# EAGLE board Remote Control (EAGLE 6.5.0)
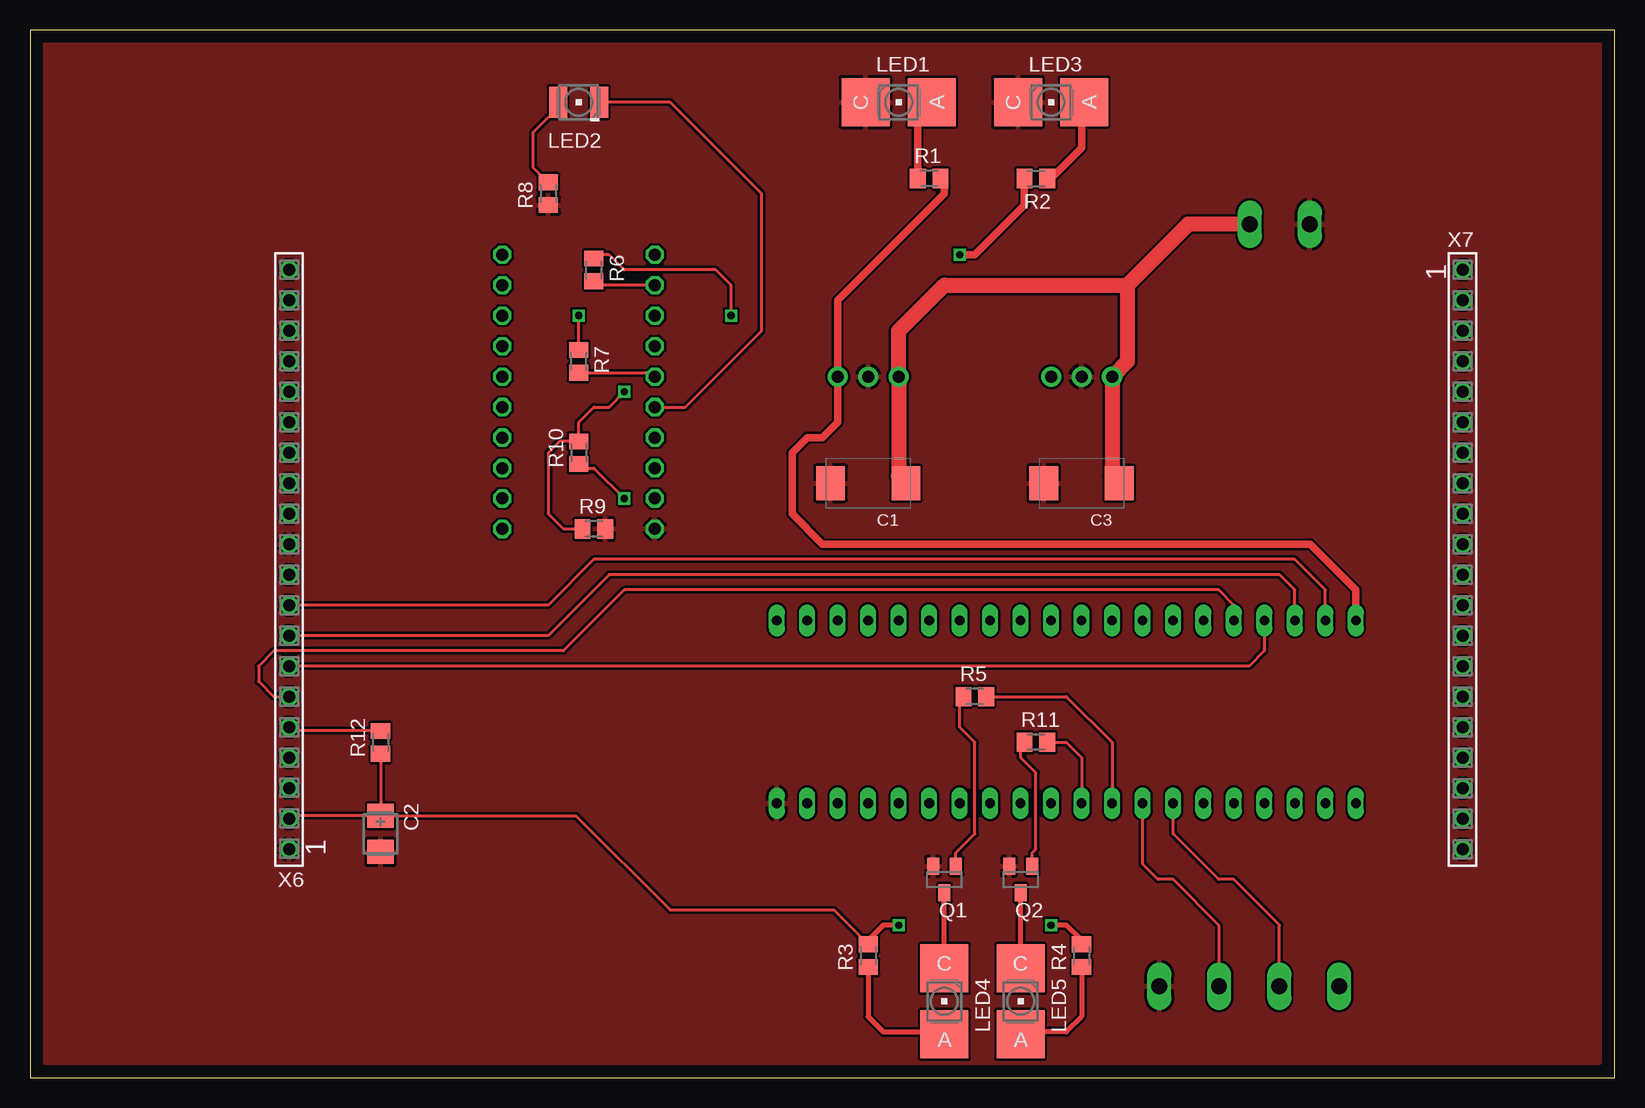
[diagram p0: board, top side]
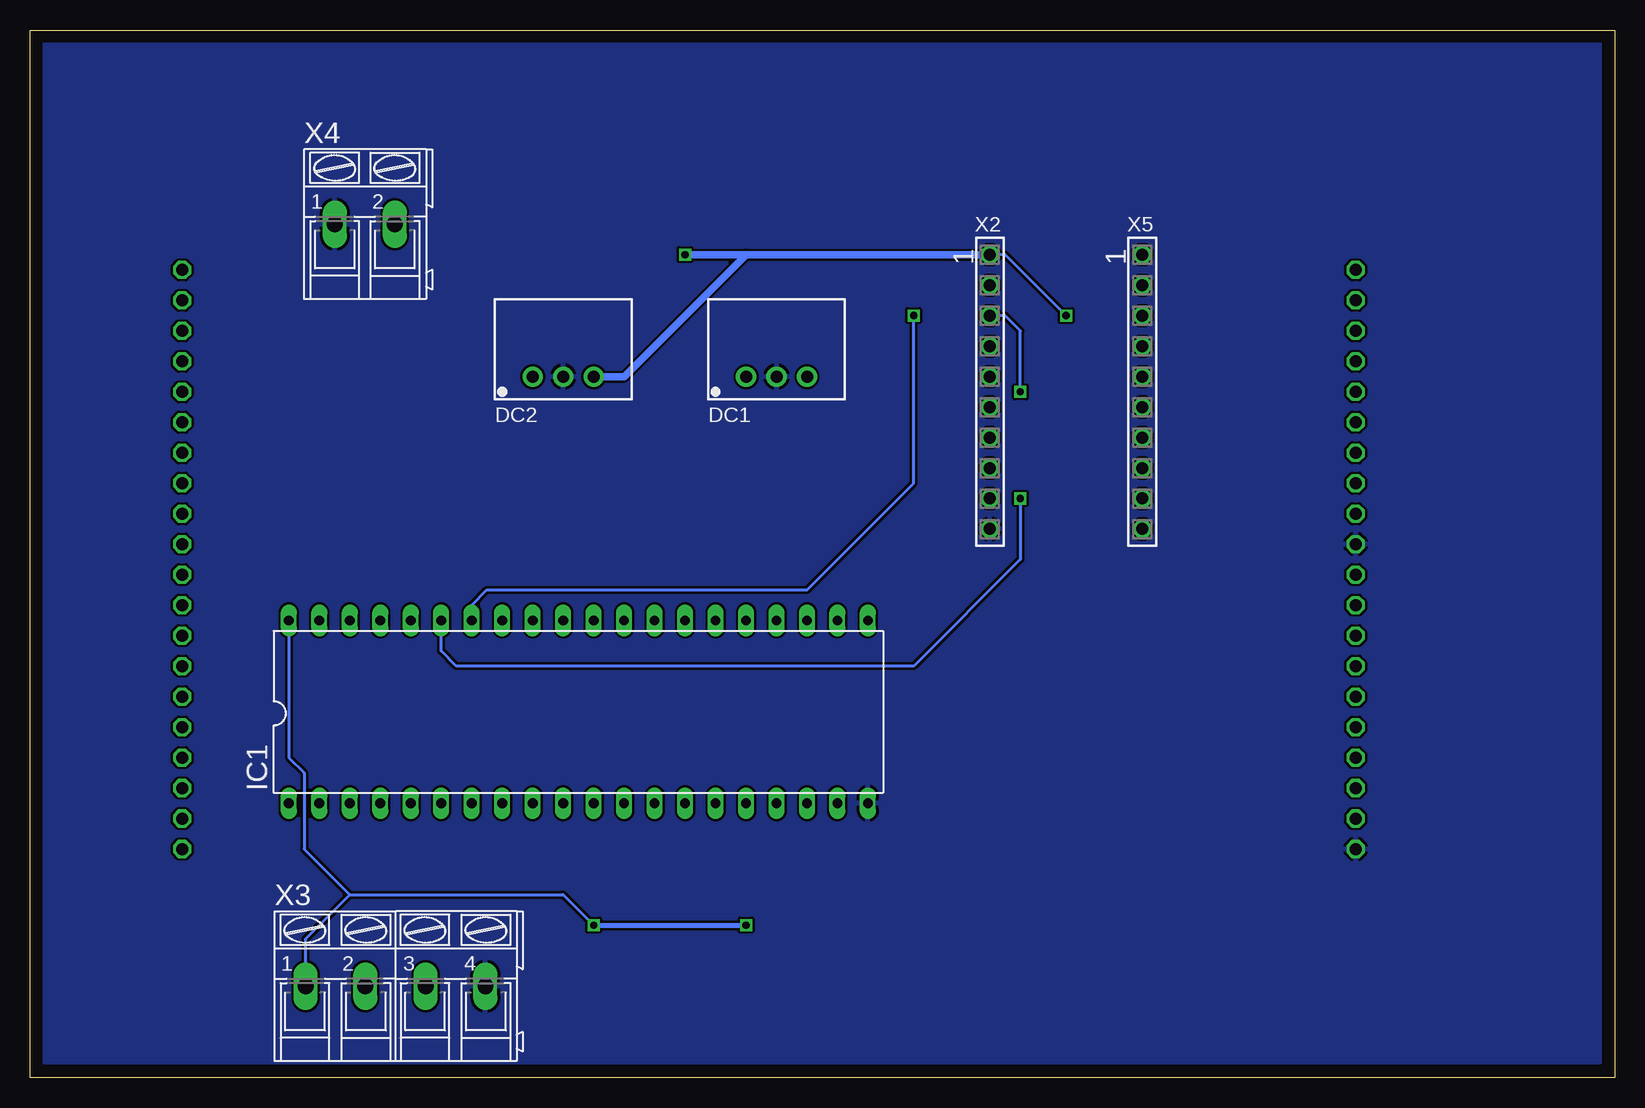
[diagram p1: board, bottom side, seen from below]

Size 132.06 x 87.3 mm. Coordinates in mm from the lower left corner, seen from the top.
Outline: 0,0 132.06,0 132.06,87.3 0,87.3 0,0
Copper layers (1*16): Top 0.035mm / dielectric 1.5mm / Bottom 0.035mm
Design rules "default": minimum track width 10mil, minimum drill 24mil, track to track 8mil, track to pad 8mil, pad to pad 8mil, via to via 8mil, smd to smd 8mil, copper to edge 40mil, drill to drill 8mil, minimum pad ring 10mil, minimum via ring 8mil, stop-mask expansion 4mil, vias tented up to drill 0mil, thermal gap 10mil

## Footprints (pad centres in the part's own frame; a part is rotated, then mirrored left to right if it is on the bottom)
SMC_E = smd 2.4 x 2.8: + -3.15,0; - 3.15,0
CT3528 = smd 2 x 2.2: + -1.5,0; - 1.5,0
SIP3 = drill 1 pad 1.676: 1 -2.54,0; 2 0,0; 3 2.54,0
DIL40 = drill 0.813 long: 1 -24.13,-7.62; 2 -21.59,-7.62; 3 -19.05,-7.62; 4 -16.51,-7.62; 5 -13.97,-7.62; 6 -11.43,-7.62; 7 -8.89,-7.62; 8 -6.35,-7.62; 9 -3.81,-7.62; 10 -1.27,-7.62; 11 1.27,-7.62; 12 3.81,-7.62; 13 6.35,-7.62; 14 8.89,-7.62; 15 11.43,-7.62; 16 13.97,-7.62; 17 16.51,-7.62; 18 19.05,-7.62; 19 21.59,-7.62; 20 24.13,-7.62; 21 24.13,7.62; 22 21.59,7.62; 23 19.05,7.62; 24 16.51,7.62; 25 13.97,7.62; 26 11.43,7.62; 27 8.89,7.62; 28 6.35,7.62; 29 3.81,7.62; 30 1.27,7.62; 31 -1.27,7.62; 32 -3.81,7.62; 33 -6.35,7.62; 34 -8.89,7.62; 35 -11.43,7.62; 36 -13.97,7.62; 37 -16.51,7.62; 38 -19.05,7.62; 39 -21.59,7.62; 40 -24.13,7.62
P-LCC-2 = smd 4 x 4: A 0,2.75; C 0,-2.75
PLCC2 = smd 2.6 x 1.5: A 0,1.7; C 0,-1.7
SOT23 = smd 1 x 1.4: 1 -0.95,-1.1; 2 0.95,-1.1; 3 0,1.1
M0805 = smd 1.3 x 1.6: 1 -0.95,0; 2 0.95,0
SSW-110-02-S-S = drill 1 pad 1.5 octagon: 1 -11.43,0; 2 -8.89,0; 3 -6.35,0; 4 -3.81,0; 5 -1.27,0; 6 1.27,0; 7 3.81,0; 8 6.35,0; 9 8.89,0; 10 11.43,0
AK300/4 = drill 1.321 long: 1 -7.493,0; 2 -2.515,0; 3 2.515,0; 4 7.493,0
AK300/2 = drill 1.321 long: 1 -2.515,0; 2 2.489,0
SSW-120-02-S-S = drill 1 pad 1.5 octagon: 1 -24.13,0; 2 -21.59,0; 3 -19.05,0; 4 -16.51,0; 5 -13.97,0; 6 -11.43,0; 7 -8.89,0; 8 -6.35,0; 9 -3.81,0; 10 -1.27,0; 11 1.27,0; 12 3.81,0; 13 6.35,0; 14 8.89,0; 15 11.43,0; 16 13.97,0; 17 16.51,0; 18 19.05,0; 19 21.59,0; 20 24.13,0

## Placement (x,y rotation side)
C1  4u7  [SMC_E]  69.85,49.53 180 top
C2  10u  [CT3528]  29.21,20.32 270 top
C3  4u7  [SMC_E]  87.63,49.53 180 top
DC1  R-785.0-1.0  [SIP3]  69.85,58.42 0 bottom
DC2  R-783.3-0.5  [SIP3]  87.63,58.42 0 bottom
IC1  [DIL40]  86.36,30.48 0 bottom
LED1  [P-LCC-2]  72.39,81.28 270 top
LED2  LG_T679-E1F1-1  [PLCC2]  45.72,81.28 90 top
LED3  [P-LCC-2]  85.09,81.28 270 top
LED4  [P-LCC-2]  76.2,6.35 180 top
LED5  [P-LCC-2]  82.55,6.35 180 top
Q1  [SOT23]  76.2,16.51 180 top
Q2  [SOT23]  82.55,16.51 180 top
R1  330  [M0805]  74.93,74.93 0 top
R2  220  [M0805]  83.82,74.93 180 top
R3  330  [M0805]  69.85,10.16 90 top
R4  330  [M0805]  87.63,10.16 90 top
R5  10k  [M0805]  78.74,31.75 0 top
R6  100  [M0805]  46.99,67.31 270 top
R7  10K  [M0805]  45.72,59.69 270 top
R8  470  [M0805]  43.18,73.66 90 top
R9  3K3  [M0805]  46.99,45.72 0 top
R10  1K8  [M0805]  45.72,52.07 90 top
R11  10k  [M0805]  83.82,27.94 0 top
R12  10K  [M0805]  29.21,27.94 90 top
X2  SSW-110-02-S-S  [SSW-110-02-S-S]  52.07,57.15 270 bottom
X3  [AK300/4]  101.6,7.62 0 bottom
X4  [AK300/2]  104.14,71.12 0 bottom
X5  SSW-110-02-S-S  [SSW-110-02-S-S]  39.37,57.15 270 bottom
X6  SSW-120-02-S-S  [SSW-120-02-S-S]  21.59,43.18 90 top
X7  SSW-120-02-S-S  [SSW-120-02-S-S]  119.38,43.18 270 top

## Library data of the parts
C1-C3 R1-R12 = rcl
DC1 DC2 = dc-dc-converter
IC1 = ic-package
LED1 LED3-LED5 = led
LED2 = led; COLOR: green
Q1 Q2 = semicon-smd-ipc
X2 X5 = con-samtec; MPN: SSW-110-02-S-S; OC_FARNELL: unknown; OC_NEWARK: 11P9482
X3 X4 = con-ptr500; OC_FARNELL: unknown; OC_NEWARK: unknown
X6 X7 = con-samtec; MPN: SSW-120-02-S-S; OC_FARNELL: unknown; OC_NEWARK: 11P9641

## Nets
3V3: DC2.3 R2.2 R7.1 X2.1
5V: C2.+ DC1.3 IC1.40 R1.2 R3.2 R4.2 R12.1 X3.1 X6.2
GND: C1.- C2.- C3.- DC1.2 DC2.2 IC1.20 LED1.C LED3.C Q1.2 Q2.2 R8.1 R9.2 X2.10 X3.4 X4.1 X6.1 X6.11
I2C_CLOCK: IC1.7 X3.2
I2C_DATA: IC1.8 X3.3
LED1: IC1.9 R5.2
LED2: IC1.10 R11.2
MISO: IC1.38 X6.8
MOSI: IC1.37 X6.7
N$1: LED2.A R8.2
N$2: LED1.A R1.1
N$3: LED3.A R2.1
N$4: LED4.A R3.1
N$5: LED4.C Q1.3
N$6: LED5.A R4.1
N$7: LED5.C Q2.3
N$8: Q1.1 R5.1
N$9: Q2.1 R11.1
N$10: R12.2 X6.5
SCK: IC1.39 X6.9
SS: IC1.36 X6.6
UART_RX: IC1.34 R6.1
UART_TX: IC1.35 R10.1
VBAT: C1.+ C3.+ DC1.1 DC2.1 X4.2
XBEELED1: LED2.C X2.6
XBEERESET1: R7.2 X2.5
XBEERX: R9.1 R10.2 X2.3
XBEETX: R6.2 X2.2

## Tracks (layer width: path | path; a pad name or v marks a point on that pad's centre or on a via)
3V3  (via drill 0.6)
  Top 0.254: R7.1 v45.72,63.5
  Top 0.61: R2.2 82.87,72.71 78.74,68.58 v77.47,68.58
  Bottom 0.254: v45.72,63.5 50.8,68.58 X2.1
  Bottom 0.61: DC2.3 82.55,58.42 72.39,68.58 | 72.39,68.58 X2.1 | v77.47,68.58 72.39,68.58
5V  (via drill 0.6)
  Top 0.254: R12.1 C2.+ | C2.+ 21.82,21.82 X6.2 | C2.+ 45.49,21.82 53.34,13.97 66.99,13.97 R3.2
  Top 0.406: R4.2 87.63,11.43 86.36,12.7 v85.09,12.7 | v72.39,12.7 71.12,12.7 69.85,11.43 R3.2
  Top 0.61: R1.2 76.2,74.61 76.2,73.66 67.31,64.77 DC1.3 67.31,54.61 66.04,53.34 64.77,53.34 63.5,52.07 63.5,46.99 66.04,44.45 106.68,44.45 110.49,40.64 IC1.40
  Bottom 0.254: X3.1 109.09,11.56 105.41,15.24 | 105.41,15.24 87.63,15.24 v85.09,12.7 | IC1.40 110.49,26.67 109.22,25.4 109.22,19.05 105.41,15.24
  Bottom 0.406: v85.09,12.7 v72.39,12.7
GND
  pour Top: 1.27,86.36 1.27,1.27 130.81,1.27 130.81,86.36
  pour Bottom: 1.27,86.36 1.27,1.27 130.81,1.27 130.81,86.36
I2C_CLOCK
  Top 0.254: X3.2 104.11,12.68 104.14,12.7 100.33,16.51 99.06,16.51 95.25,20.32 IC1.7
I2C_DATA
  Top 0.254: X3.3 99.08,12.68 95.25,16.51 93.98,16.51 92.71,17.78 IC1.8
LED1
  Top 0.254: R5.2 86.36,31.75 90.17,27.94 IC1.9
LED2
  Top 0.254: R11.2 86.36,27.94 87.63,26.67 IC1.10
MISO
  Top 0.254: IC1.38 105.41,40.64 104.14,41.91 48.26,41.91 43.18,36.83 X6.8
MOSI
  Top 0.254: IC1.37 102.87,35.56 101.6,34.29 X6.7
N$1
  Top 0.254: LED2.A 44.02,80.85 41.91,78.74 41.91,75.88 R8.2
N$2
  Top 0.61: R1.1 73.98,80.12 LED1.A
N$3
  Top 0.61: R2.1 85.09,74.93 87.63,77.47 87.63,81.07 LED3.A
N$4
  Top 0.406: R3.1 69.85,5.08 71.12,3.81 75.99,3.81 LED4.A
N$5
  Top 0.406: LED4.C Q1.3
N$6
  Top 0.406: R4.1 87.63,5.08 86.36,3.81 82.76,3.81 LED5.A
N$7
  Top 0.406: LED5.C Q2.3
N$8
  Top 0.254: Q1.1 77.15,18.73 78.74,20.32 78.74,27.94 77.47,29.21 77.47,31.43 R5.1
N$9
  Top 0.254: Q2.1 83.5,18.73 83.82,19.05 83.82,25.4 82.55,26.67 82.55,27.62 R11.1
N$10
  Top 0.254: R12.2 21.91,28.89 X6.5
SCK
  Top 0.254: IC1.39 107.95,40.64 105.41,43.18 46.99,43.18 43.18,39.37 X6.9
SS
  Top 0.254: IC1.36 100.33,39.37 99.06,40.64 49.53,40.64 44.45,35.56 20.32,35.56 19.05,34.29 19.05,33.02 20.32,31.75 X6.6
UART_RX  (via drill 0.6)
  Top 0.254: v58.42,63.5 58.42,66.04 57.15,67.31 49.53,67.31 48.26,68.58 47.31,68.58 R6.1
  Bottom 0.254: IC1.34 95.25,39.37 93.98,40.64 67.31,40.64 58.42,49.53 v58.42,63.5
UART_TX  (via drill 0.6)
  Top 0.254: R10.1 45.72,50.8 46.99,50.8 v49.53,48.26
  Bottom 0.254: v49.53,48.26 49.53,43.18 58.42,34.29 96.52,34.29 97.79,35.56 IC1.35
VBAT
  Top 1.27: X4.2 96.52,71.12 91.44,66.04 | 91.44,66.04 91.44,59.69 DC2.1 90.17,50.14 C3.+ | 91.44,66.04 76.2,66.04 72.39,62.23 DC1.1 72.39,50.14 C1.+
XBEELED1
  Top 0.254: X2.6 54.61,55.88 60.96,62.23 60.96,73.66 53.34,81.28 LED2.C
XBEERESET1
  Top 0.254: R7.2 51.75,58.74 X2.5
XBEERX  (via drill 0.6)
  Top 0.254: R9.1 44.45,45.72 43.18,46.99 43.18,52.07 44.13,53.02 R10.2 45.72,54.61 46.99,55.88 48.26,55.88 v49.53,57.15
  Bottom 0.254: v49.53,57.15 49.53,62.23 50.8,63.5 X2.3
XBEETX
  Top 0.254: 46.99,66.04 R6.2 47.31,66.04 X2.2